# Altium PCB PCB1.PcbDoc
Units mil, origin at the board's own origin, x right, y up, seen from the top; angles counter-clockwise.
Board outline 3630.03 x 2820.03 mil, 2 copper layers (Top Layer, Bottom Layer); 66 components, 57 nets, 226 pads, 69 vias.
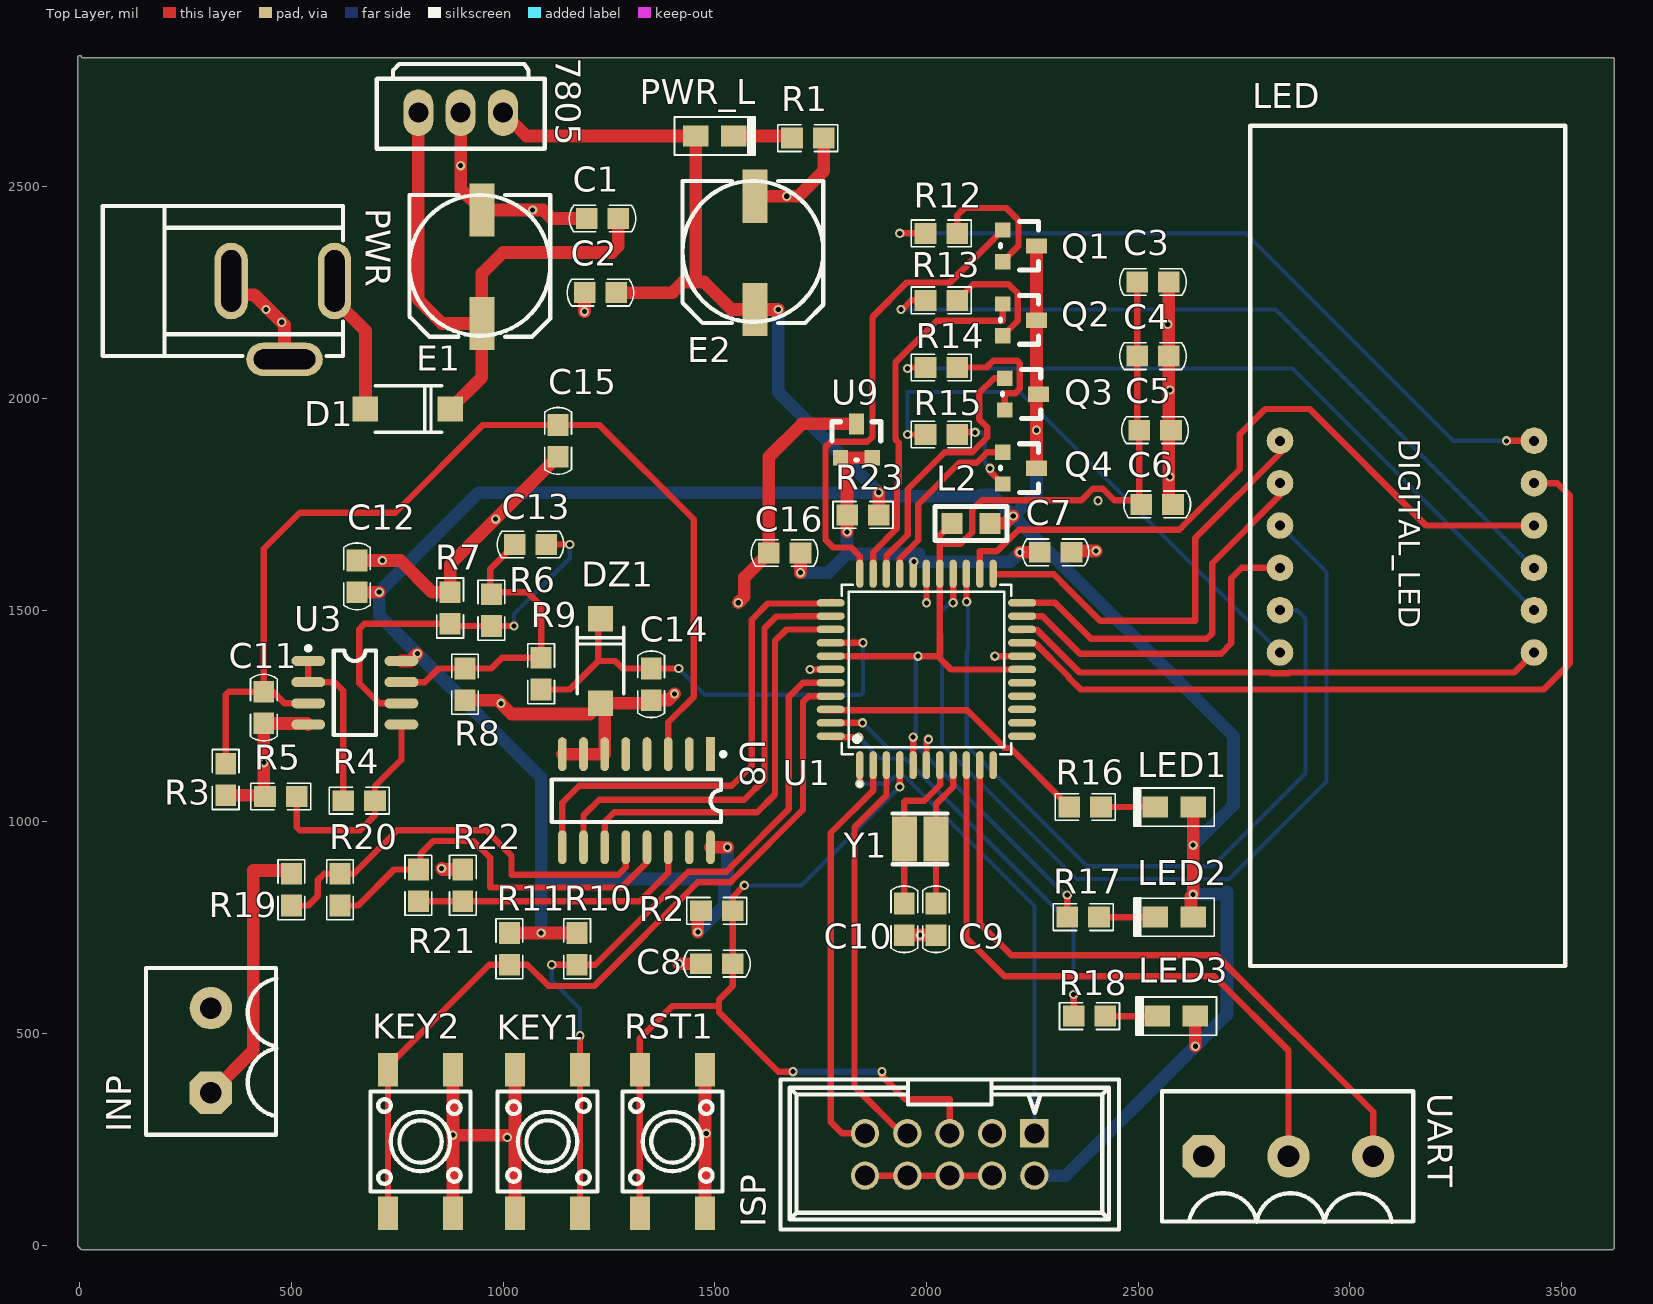
[diagram p0: Top Layer view]
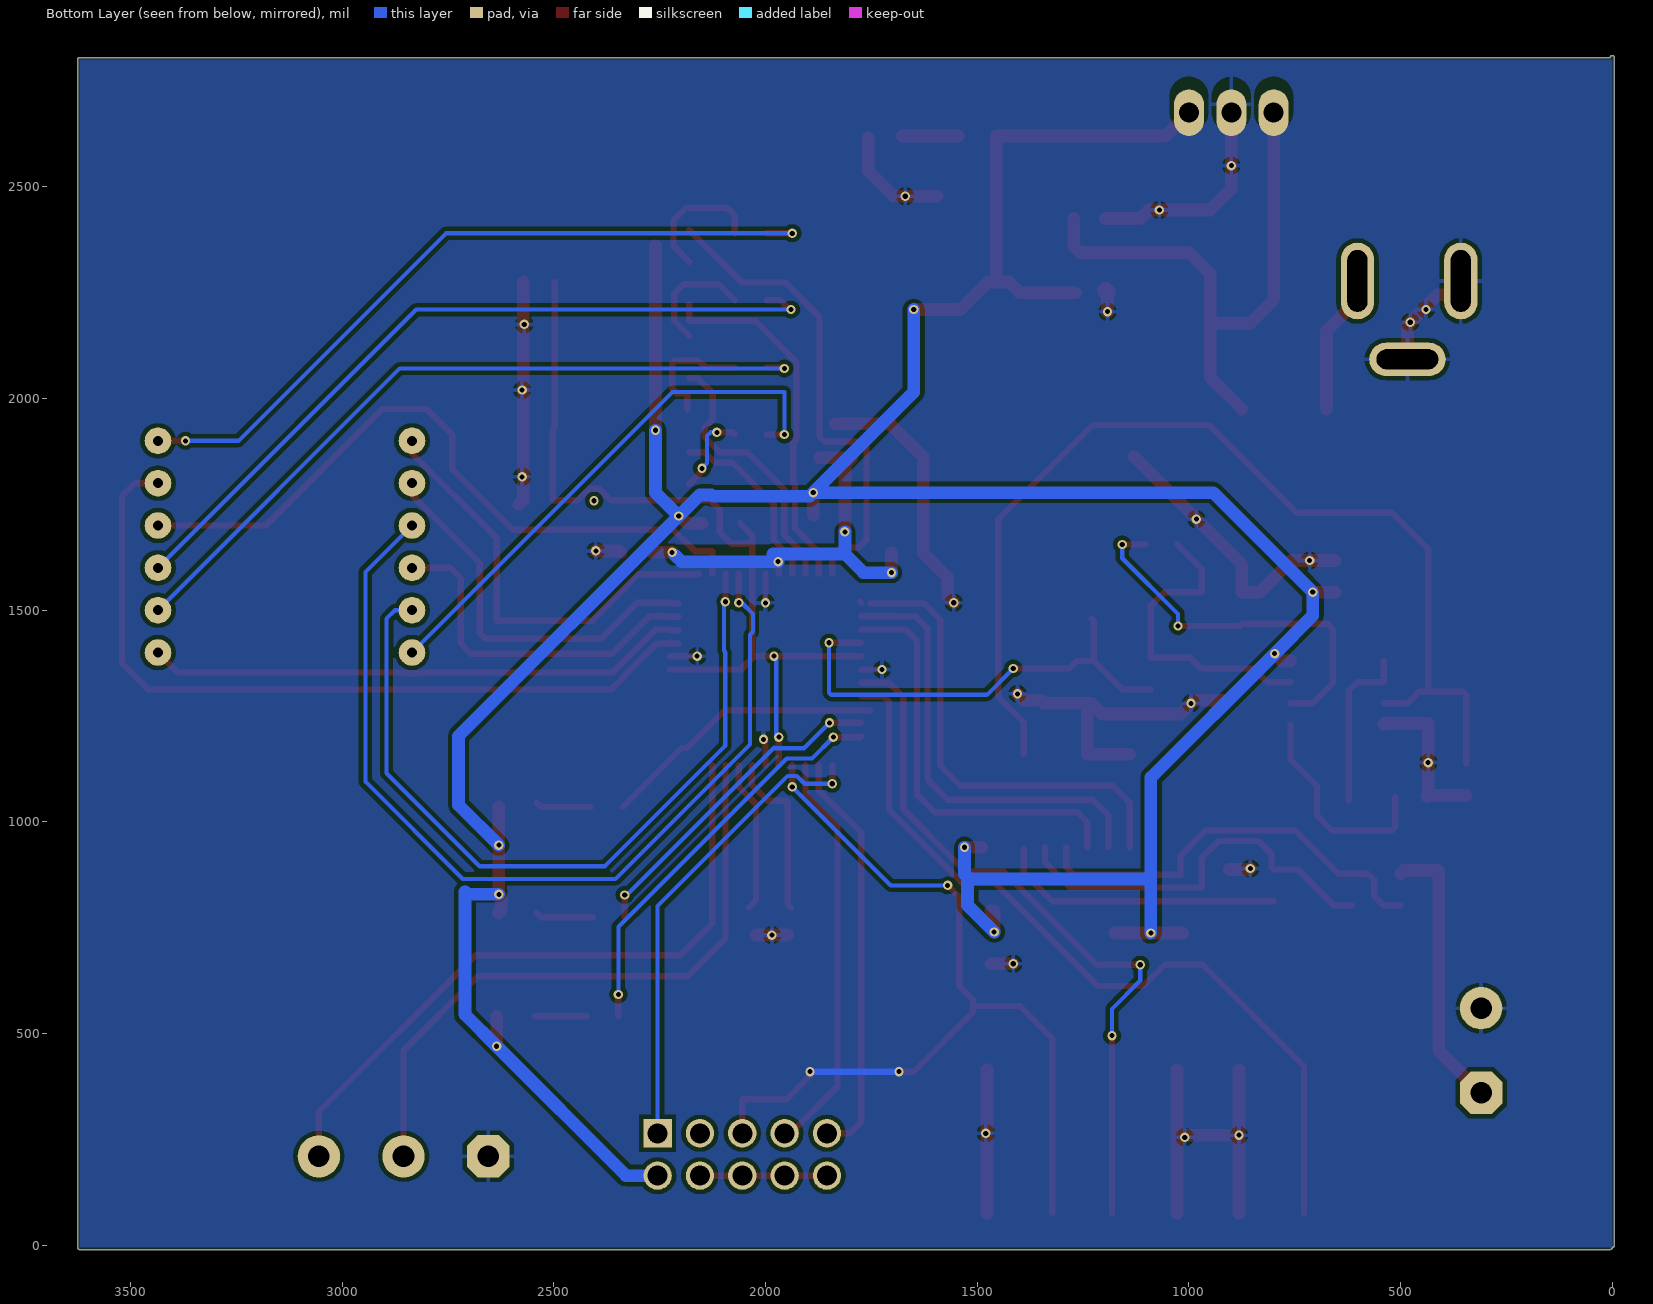
[diagram p1: Bottom Layer view, seen from below]

## Layer stack, top to bottom
Top Solder: solder mask 0.4, Solder Resist, Dk 3.5
Top Layer: signal copper 1.4
Dielectric 1: dielectric 12.6, FR-4, Dk 4.8
Bottom Layer: signal copper 1.4
Bottom Solder: solder mask 0.4, Solder Resist, Dk 3.5

## Board outline
-5.01,0 ccw(c0,0) -0.01,-5.02 ccw(c5,-5) 5,-10.02 3620,-10.02 ccw(c3620,-5) 3625.02,-5 3625.02,2800 ccw(c3620,2800) 3620,2805.02 5.01,2805.02 ccw(c0,2805) -5.01,2805

## Design rules (kind name [scope] priority, off if disabled: settings)
Clearance [All] p1: gap=10 ignorepadtopadclearanceinfootprint=FALSE except(0: Arc-Hole Track-Hole SMDPad-Hole THPad-Hole Via-Hole Fill-Hole Poly-Hole Region-Hole Text-Hole)
PolygonConnect [All] p1: connectstyle=Relief reliefconductorwidth=10 reliefentries=4 polygonreliefangle="90 Angle" airgapwidth=10
RoutingVias [All] p1: holewidth=28 width=50 viastyle="Through Hole" minholewidth=28 minwidth=50 maxholewidth=28 maxwidth=50
SolderMaskExpansion [All] p1: expansion=4
Width [All] p1: maxlimit=30 minlimit=10 preferedwidth=30 toplayer_minwidth=15 toplayer_maxwidth=15 toplayer_prefwidth=15 minimp=50.000000 maximp=50.000000 favimp=50.000000
30 further rules are at their usual default settings.

## Components (designator, comment, footprint, x,y, rotation, side; value= is the part's Value field where it differs from the comment)
7805 "7805" 7805 800,2675 r0 top
C1 "100nF/0805" C0805 1235,2425 r0 top value=104
C2 "100nF/0805" C0805 1230,2250 r0 top value=104
C3 "100nF/0805" C0805 2535,2275 r0 top value=104
C4 "100nF/0805" C0805 2535,2100 r0 top value=104
C5 "100nF/0805" C0805 2540,1925 r0 top value=104
C6 "100nF/0805" C0805 2545,1750 r0 top value=104
C7 "100nF/0805" C0805 2305,1636.71 r0 top value=104
C8 "10uF" C0805 1505,665 r180 top
C9 "100nF/0805" C0805 2022.41,770 r90 top value=104
C10 "100nF/0805" C0805 1947.59,770 r90 top value=104
C11 "100nF/0805" C0805 435,1270 r90 top value=104
C12 "100nF/0805" C0805 655,1580 r90 top value=104
C13 "100nF/0805" C0805 1065,1655 r180 top value=104
C14 "100nF/0805" C0805 1350,1325 r270 top value=104
C15 "47p" C0805 1130,1900 r90 top
C16 "10uF" C0805 1665,1635 r180 top
D1 "SS34" SMA 875,1975 r180 top
DZ1 "1SMA4728A" SMA 1230,1480 r270 top
E1 "220uF/35V" CAP-8*10.5MM/CDVT 1111.42,2480.79 r90 top
E2 "220uF/35V" CAP-8*10.5MM/CDVT 1756.42,2513.5 r90 top
INP "P" POWER2 310,360 r90 top
ISP "P10" IDC-10P 2055,214.51 r180 top
KEY1 "SW-BUTTON" KEY-SMD_4P-6-6 1105,245 r270 top
KEY2 "SW-BUTTON" KEY-SMD_4P-6-6 805,245 r90 top
L2 "Inductor" 0805L 2105.24,1705 r0 top
LED "LED 4*8" DIGITAL_LED_0.56 2835,1900 r270 top
LED1 "LED" LED0805 2630,1035 r0 top
LED2 "LED" LED0805 2630,775 r0 top
LED3 "LED" LED0805 2635,541.21 r0 top
PWR "DC005-T" DC005 480,2185 r0 top
PWR_L "LED" LED0805 1455,2620 r180 top
Q1 "8050" SOT-23 2180,2398 r270 top
Q2 "8050" SOT-23 2180,2223 r270 top
Q3 "8050" SOT-23 2185,2048 r270 top
Q4 "8050" SOT-23 2180,1873 r270 top
R1 "4K7/0805" R0805 1720,2615 r0 top value=1K
R2 "10K" R0805 1505,790 r180 top value=1K
R3 "10K" R0805 345,1100 r90 top value=1K
R4 "2K/0805" R0805 660,1050 r0 top value=1K
R5 "6K2/0805" R0805 475,1060 r0 top value=1K
R6 "6K2/0805" R0805 972.4,1500 r270 top value=1K
R7 "2K/0805" R0805 875,1505 r90 top value=1K
R8 "10K/0805" R0805 910,1325 r270 top value=1K
R9 "10K/0805" R0805 1090,1350 r270 top value=1K
R10 "4K7/0805" R0805 1175,700 r90 top value=1K
R11 "4K7/0805" R0805 1015,700 r90 top value=1K
R12 "4K7/0805" R0805 2035,2390 r180 top value=1K
R13 "4K7/0805" R0805 2035,2231.67 r180 top value=1K
R14 "4K7/0805" R0805 2035,2073.33 r180 top value=1K
R15 "4K7/0805" R0805 2035,1915 r180 top value=1K
R16 "4K7/0805" R0805 2375,1035 r180 top value=1K
R17 "4K7/0805" R0805 2370,775 r180 top value=1K
R18 "4K7/0805" R0805 2385,541.21 r180 top value=1K
R19 "10K/0805" R0805 500,840 r90 top value=1K
R20 "40.2K/0805" R0805 615,840 r90 top value=1K
R21 "40.2K/0805" R0805 800,850 r90 top value=1K
R22 "10K/0805" R0805 905,850 r270 top value=1K
R23 "510R" R0805 1850,1725 r0 top value=1K
RST1 "SW-BUTTON" KEY-SMD_4P-6-6 1400,245 r90 top
U1 "ATMEGA16A-AU" TQFP-44 2000,1360 r0 top
U3 "LM258" SO-8 540,1380 r0 top
U8 "CD4051BC" SO-16 1490,1160 r270 top
U9 "TL431" TL431 1797,1860 r90 top
UART "P" POWER3 2655,210 r0 top
Y1 "8M" SMD3225 1985,960 r0 top

## Footprints (in the part's own frame and the unit in brackets; to place one, negate y for a bottom-side part, rotate by r counter-clockwise, add the part's x,y. Pads: shape width x height; smd on the part's side, far side on the other; paste and mask are expansions set on the pad)
0805L [mm]
  rect 1.25x1.25 smd: 1(-1.143,0) 2(1.143,0)
  silkscreen extent -2.16,-1.02 2.16,1.02
7805 [mm]
  oval 1.8x2.8 hole 1.2: 1(0,0) 2(2.54,0) 3(5.08,0)
  silkscreen extent -2.49,-2.16 7.59,2.92
C0805 [mm]
  rect 1.3x1.25 smd: 1(-0.95,0) 2(0.95,0)
  silkscreen extent -2,-0.8 2,0.8
CAP-8*10.5MM/CDVT [mm]
  rect 3.2x1.5 smd: 1(-7.709,4.1) 2(-0.909,4.1)
  silkscreen extent -8.51,0 0,8.45
DC005 [mm]
  oval 2x4.6 hole 1.2 slot 3.7 at 90 deg: 1(3.1,2.35) 2(-3.1,2.35)
  oval 4.6x2 hole 1.2 slot 3.7 at 0 deg: 3(0.1,-2.35)
  silkscreen extent -10.8,-2.15 3.6,6.85
DIGITAL_LED_0.56 [mm]
  round 1.6 hole 0.6: 1(0,0) 2(2.54,0) 3(5.08,0) 4(7.62,0) 5(10.16,0) 6(12.7,0) 7(12.7,15.24) 8(10.16,15.24) 9(7.62,15.24) 10(5.08,15.24) 11(2.54,15.24) 12(0,15.24)
  silkscreen extent -18.9,-1.78 31.5,17.12
IDC-10P [mm]
  rect 1.7x1.7 hole 1.2: 1(-5.08,-1.27)
  round 1.7 hole 1.2: 2(-5.08,1.27) 3(-2.54,-1.27) 4(-2.54,1.27) 5(0,-1.27) 6(0,1.27) 7(2.54,-1.27) 8(2.54,1.27) 9(5.08,-1.27) 10(5.08,1.27)
  silkscreen extent -10.16,-4.5 10.16,4.5
KEY-SMD_4P-6-6 [mm]
  rect 2x1.2 smd: 1(-4.3,1.95) 1(4.3,1.95) 2(-4.3,-1.95) 2(4.3,-1.95)
  silkscreen extent -3,-3 3,3
LED0805 [mil]
  rect 60x50 smd: 1(0,0) 2(-90,0)
  silkscreen extent -141,-45 50,47
POWER2 [mm]
  oct 2.54x2.54 hole 1.3: 1(0,0)
  round 2.54 hole 1.3: 2(5.08,0)
  silkscreen extent -2.51,-3.92 7.49,3.9
POWER3 [mm]
  oct 2.54x2.54 hole 1.3: 1(0,0)
  round 2.54 hole 1.3: 2(5.08,0) 3(10.16,0)
  silkscreen extent -2.51,-3.94 12.57,3.9
R0805 [mm]
  rect 1.3x1.25 smd: 1(-0.95,0) 2(0.95,0)
  silkscreen extent -1.8,-0.8 1.8,0.8
SMA [mil]
  rect 60x59.06 smd: 1(200,0) 2(0,0)
  silkscreen extent 20,-55 177,55
SMD3225 [mm]
  rect 1.5x2.7 smd: 1(0.95,0) 2(-0.95,0)
  silkscreen extent -1.65,-1.52 1.65,1.52
SO-8 [mil]
  oval 80x24 smd: 1(0,0) 2(0,-50) 3(0,-100) 4(0,-150) 5(220,-150) 6(220,-100) 7(220,-50) 8(220,0)
  silkscreen extent -5,-175 160,35
SO-16 [mil]
  rect 80x20.47 smd: 1(0,0)
  oval 80x20.47 smd: 2(0,-50) 3(0,-100) 4(0,-150) 5(0,-200) 6(0,-250) 7(0,-300) 8(0,-350) 9(220,-350) 10(220,-300) 11(220,-250) 12(220,-200) 13(220,-150) 14(220,-100) 15(220,-50) 16(220,0)
  silkscreen extent -5,-375 160,35
SOT-23 [mil]
  rect 36x36 smd: 1(0,0) 2(75,0)
  rect 36x50 smd: 3(38,80)
  silkscreen extent -20,-5 95,85
TL431 [mil]
  rect 36x36 smd: 1(0,0) 2(0,-75)
  rect 50x36 smd: 3(80,-38)
  silkscreen extent -5,-95 85,20
TQFP-44 [mm]
  oval 0.448x1.684 smd: 1(-4,-5.742) 2(-3.2,-5.742) 3(-2.4,-5.742) 4(-1.6,-5.742) 5(-0.8,-5.742) 6(0,-5.742) 7(0.8,-5.742) 8(1.6,-5.742) 9(2.4,-5.742) 10(3.2,-5.742) 11(4,-5.742) 23(4,5.742) 24(3.2,5.742) 25(2.4,5.742) 26(1.6,5.742) 27(0.8,5.742) 28(0,5.742) 29(-0.8,5.742) 30(-1.6,5.742) 31(-2.4,5.742) 32(-3.2,5.742) 33(-4,5.742)
  oval 1.684x0.448 smd: 12(5.742,-4) 13(5.742,-3.2) 14(5.742,-2.4) 15(5.742,-1.6) 16(5.742,-0.8) 17(5.742,0) 18(5.742,0.8) 19(5.742,1.6) 20(5.742,2.4) 21(5.742,3.2) 22(5.742,4) 34(-5.742,4) 35(-5.742,3.2) 36(-5.742,2.4) 37(-5.742,1.6) 38(-5.742,0.8) 39(-5.742,0) 40(-5.742,-0.8) 41(-5.742,-1.6) 42(-5.742,-2.4) 43(-5.742,-3.2) 44(-5.742,-4)
  silkscreen extent -5.08,-6.98 5.08,5.08

## Part data
C1 C2 C3 C4 C5 C6 C7 C9 C10 C11 C12 C13 C14: library part "Cap Semi", "Capacitor (Semiconductor SIM Model)", LatestRevisionDate=17-Jul-2002, LatestRevisionNote="Re-released for DXP Platform.", PackageReference=C1206, Published=8-Jun-2000, Publisher="Altium Limited"
C8 C16: library part CAP, "普通小电容", mark=10uF/16V/0805
C15: library part "Cap Pol1", "Polarized Capacitor (Radial)", Manufacturer="Generic Components", Class=Passive, Published=08/06/2000, Publisher="Altium Hobart Technology Centre", SubClass=Capacitor
D1: library part "Diode 1N914", "High Conductance Fast Diode", Code_JEDEC=DO-204-AH, ComponentLink1Description="Manufacturer Link", ComponentLink1URL=http://www.fairchildsemi.com/, ComponentLink2Description=Datasheet, ComponentLink2URL=http://www.fairchildsemi.com/ds/1N%2F1N4448.pdf, DatasheetVersion=1997, LatestRevisionDate=17-Jul-2002, LatestRevisionNote="Re-released for DXP Platform.", PackageReference=DO-35, Published=8-Jun-2000, Publisher="Altium Limited"
DZ1: library part DZ, "Schottky Rectifier", mark=1SMA4728A
E1 E2: library part ELECTRO2, "Electrolytic Capacitor"
INP: library part P2
KEY1 KEY2 RST1: "6*6*5mm轻触开关"
LED: library part LED4*8
PWR: BOM_JLCPCB Part Class="Extended Part", BOM_Manufacturer="SHOU HAN", BOM_Manufacturer Part=DC005-T, BOM_Supplier=LCSC, BOM_Supplier Part=C431532, Contributor=LCSC, spicePre=D, spiceSymbolName=DC005-T
Q1 Q2 Q3 Q4: library part TRIODE-NPN-MMBT3904, "Transistor;NPN;40V;200mA;SOT23;1.1mm;ROHS", Manufacture 1=长?, Manufacture 1 P/N=MMBT3904, Geometry.Height=1.1mm, PCB DECAL=SOT-23(MMBT3904), Serial Number=81232000008
R1 R2 R3 R4 R5 R6 R7 R8 R9 R10 R11 R12 R13 R14 R15 R16 R17 R18 R19 R20 R21 R22 R23: library part RES, "Resistor", LatestRevisionDate=17-Jul-2002, LatestRevisionNote="Re-released for DXP Platform.", PackageReference=AXIAL-0.4, Published=8-Jun-2000, Publisher="Altium Limited"
  R1 R10 R11 R12 R13 R14 R15 R16 R17 R18: mark=4K7/0805
  R2 R3 R8 R9 R19 R22: mark=10K/0805
  R4 R7: mark=2K/0805
  R5 R6: mark=6K2/0805
  R20 R21: mark=40.2K/0805
  R23: mark=510R/0805
U1: BOM_JLCPCB Part Class="Extended Part", BOM_Manufacturer=MICROCHIP, BOM_Manufacturer Part=ATMEGA16A-AU, BOM_Supplier=LCSC, BOM_Supplier Part=C5658, spicePre=U, spiceSymbolName=ATMEGA16A-AU
U3: library part LM393, "电压比较器"
UART: library part P3
Y1: library part XTAL, "Crystal Oscillator", LatestRevisionDate=17-Jul-2002, LatestRevisionNote="Re-released for DXP Platform.", PackageDescription="Crystal, Thru-Hole; 2 Leads; Body 3.1 x 8.2 mm (Dia.xH)", PackageReference=R38, Published=8-Jun-2000, Publisher="Altium Limited"
L2: Code_IEC=1005, Code_JEITA=0402, LatestRevisionDate=29-May-2009, LatestRevisionNote="IPC-7351 Footprint Added.", mark=4.7uH\0805, PackageDescription="Chip Inductor", PackageReference=0402-A, Published=8-Jun-2000, Publisher="Altium Limited"
U9: LatestRevisionDate=17-Jul-2002, LatestRevisionNote="Re-released for DXP Platform.", mark=TL431, PackageDescription="Diode, Thru-Hole; 2 Leads; 0.7 in Pin Spacing", PackageReference=DIODE-0.7, Published=8-Jun-2000, Publisher="Altium Limited"

## Via types
v1: diameter 22, hole 12, Top Layer to Bottom Layer, tented both sides, 69 vias

## Nets (pads, with @x,y where several pads share a name; then routed paths per layer and width w, separated by ;. In a path a pad name is that pad's centre, name@x,y a point inside that pad or via, vN(x,y) a via of type N, cw(c..) or ccw(c..) an arc to the next point about the centre after c; other vN are vias at no path point)
+5V: 7805.3 C2.2 C12.1 E2.1 ISP.2 L2.2 LED1.1 LED2.1 LED3.1 PWR_L.1 Q1.3 Q2.3 Q3.3 Q4.3 R2.2 R10.2 R11.2 R23.2 U3.8 U8.16 | length 8584.1
  Top Layer w30: C12.1 v1(707.6,1542.6) ; U3.8 780.26,1380 v1(797.5,1397.24) ; 7805.3 1055,2620 1300,2620 PWR_L.1 1455,2275 ; R11.2 v1(1090,737.4) R10.2 ; C2.2 1400,2250 1425,2275 1455,2275 ; v1(1460,740) 1460,790 R2.2 ; U8.16 v1(1530,940) ; v1(1650,2210) E2.1 1540,2210 1475,2275 1455,2275 ; R23.2 v1(1887.4,1777.6) ; L2.2 2185.04,1705 2202.54,1722.5 v1(2205.04,1722.5) ; Q4.3 v1(2260,1925) Q2.3 Q1.3 ; LED2.1@2630,785 2625,790 2625,823.85 v1(2630,828.85) v1(2630,945) LED1.1 ; v1(2635,470) LED3.1
  Bottom Layer w10: 1518.21,865 1523.21,870 ; v1(1887.4,1777.6) v1@1893,1772
  Bottom Layer w30: v1(1090,737.4) 1090,865 ; v1(1460,740) 1523.21,803.21 1523.21,870 1530,876.79 v1(1530,940) ; 1518.21,865 1090,865 ; v1(1650,2210) 1650,2015 v1(1887.4,1777.6) 942.6,1777.6 v1(707.6,1542.6) 707.6,1487.14 v1(797.5,1397.24) 1090,1104.74 1090,865 ; v1@1893,1772 1896,1769 2124.91,1769 2127.91,1772 2155.54,1772 v1(2205.04,1722.5) ; ISP.2 2329.51,164.51 v1(2635,470) 2710,545 2710,835.18 2703.67,828.85 v1(2630,828.85) ; v1(2260,1925) 2260,1777.46 v1(2205.04,1722.5) ; v1(2630,945) 2725,1040 2725,1202.54 v1(2205.04,1722.5)
A: LED.11 U1.19 | length 1881.6
  Top Layer w15: U1.19@2205.04,1421.46 U1.19@2227.6,1421.46 ; U1.19 U1.19@2227.6,1421.46 ; LED.11 3490,1800 3520,1770 3520,1375 3457.6,1312.6 2364.64,1312.6 2336.46,1340.79 2336.46,1342.65 2257.65,1421.46 U1.19@2227.6,1421.46
ADC0: C14.1 DZ1.2 R9.2 U1.37 | length 1119.3
  Top Layer w15: R9.2 1157.6,1312.6 1225,1380 ; DZ1.2 1225,1475 1225,1380 ; v1(1415,1362.4) C14.1 1282.6,1362.4 1265,1380 1225,1380 ; U1.37 v1(1850,1422.99)
  Bottom Layer w10: v1(1415,1362.4) 1477.4,1300 1845,1300 1850,1305 v1(1850,1422.99)
B: LED.7 U1.20 | length 1293.1
  Top Layer w15: U1.20@2205.04,1452.95 U1.20@2226.06,1452.95 ; U1.20 2259.98,1454.49 2361.59,1352.87 2812.84,1352.87 2814.71,1351 2855.29,1351 2857.16,1352.87 3387.87,1352.87 LED.7
C: LED.4 U1.21 | length 840.5
  Top Layer w15: U1.21@2205.04,1484.45 U1.21@2226.06,1484.45 ; U1.21 2274.02,1485.98 2362.6,1397.4 2695.91,1397.4 2720,1421.49 2720,1575 2745,1600 LED.4
CD4501_A: U1.36 U8.11 | length 994.6
  Top Layer w15: U8.11 1240,1000 1262.4,1022.4 1600,1022.4 1642.4,1064.8 1642.4,1427.4 1669.49,1454.49 U1.36
CD4501_B: U1.35 U8.10 | length 1058.6
  Top Layer w15: U8.10 1190,1015.36 1227.24,1052.6 1570,1052.6 1617.4,1100 1617.4,1457.4 1645.14,1485.14 1690.1,1485.14 1690.94,1485.98 ; 1695.91,1485.98 U1.35
CD4501_C: U1.34 U8.9 | length 1118.9
  Top Layer w15: U8.9 1140,1045 1180,1085 1540,1085 1587.39,1132.39 1587.39,1477.74 1625.59,1515.94 U1.34@1752.91,1515.94 ; U1.34 U1.34@1776.46,1520
D: LED.2 U1.22 | length 931.7
  Top Layer w15: U1.22@2205.04,1515.94 U1.22@2226.06,1515.94 ; U1.22 2303.46,1517.48 2388.54,1432.4 2662.4,1432.4 2675,1445 2675,1611.25 2835,1771.25 LED.2
DP: LED.3 U1.26 | length 2209.2
  Top Layer w15: v1(2062.99,1517.48) U1.26
  Bottom Layer w10: v1(2062.99,1517.48) 2056.26,1517.48 2029.77,1490.99 2029.77,1449.23 2036.99,1442.01 2036.99,1183.01 2354.82,865.18 2715.18,865.18 2945,1095 2945,1590 LED.3
E: LED.1 U1.23 | length 1028.6
  Top Layer w15: U1.23 2159.02,1584.53 2300.78,1584.53 2318.5,1566.8 2318.5,1566.5 2410,1475 2635,1475 2635,1670.49 2840,1875.49 LED.1@2840,1895
F: LED.10 U1.24 | length 1663.3
  Top Layer w15: U1.24 2125.98,1639.02 2166.67,1639.02 2217.65,1690 2597.35,1690 2740,1832.65 2740,1915 2800,1975 2905,1975 3180,1700 LED.10
G: LED.5 U1.25 | length 1851.3
  Top Layer w15: v1@2094.49,1520 U1.25
  Bottom Layer w10: v1(2095,1520) 2098.4,1516.6 2098.4,1404.23 2095,1400.83 2095,1180 2380,895 2675,895 2895,1115 2895,1480 2875,1500 LED.5
GND: 7805.2 C1.1 C2.1 C3.2 C4.2 C5.2 C6.2 C7.2 C8.2 C9.1 C10.1 C11.1 C12.2 C14.2 C15.1 C16.2 DZ1.1 E1.2 E2.2 INP.2 KEY1.2 KEY2.2 PWR.2 PWR.3 R1.2 R3.1 R5.1 R7.2 R8.2 R22.1 RST1.2 U1.6 U1.18 U1.28 U1.39 U3.4 U8.6 U8.7 U8.8 U9.3 UART.1 | length 5671.5
  Top Layer w1: C12.2@647.6,1610 C12.2
  Top Layer w15: v1(1725,1360) U1.39 ; U1.6 v1@2000,1195 ; v1(2000,1517.4) U1.28 ; v1(2161.5,1391.5) U1.18
  Top Layer w30: R3.1 R5.1@435,1062.6 ; PWR.2 390.48,2245 412.28,2245 v1(477.28,2180) 483.94,2173.34 PWR.3 ; R5.1 R5.1@435,1062.6 ; U3.4 537.4,1232.6 C11.1 v1(435,1140) R5.1@435,1062.6 ; C12.2 v1(715,1617.4) 757.6,1617.4 832.6,1542.4 R7.2 875,1607.6 C15.1 ; v1(855,890) 857.6,887.4 R22.1 ; KEY2.2@881.78,75.71 v1(881.78,260) ; KEY2.2@881.78,414.29 v1(881.78,260) ; 7805.2 v1(900,2550) 900,2495 E1.2 v1(1070,2445) 1095,2445 1115,2425 C1.1 ; R8.2 987.4,1287.6 v1(995,1280) 1020,1255 1205,1255 DZ1.1 ; KEY1.2@1028.22,75.71 1028.22,264.51 ; KEY1.2@1028.22,414.29 1028.22,264.51 ; U8.8 U8.7 U8.6 1240,1270 DZ1.1 ; v1(1192.6,2205) C2.1 ; v1(1405,1302.43) 1390.17,1287.6 C14.2 1342.4,1280 DZ1.1 ; v1(1415,665) C8.2 ; RST1.2@1476.78,75.71 RST1.2@1476.78,414.29 ; v1(1555.48,1517.48) 1570,1532 1570,1577.4 C16.2 1627.6,1861.69 1705.91,1940 U9.3 ; E2.2 v1(1670,2477.72) 1697.72,2477.72 1757.4,2537.4 R1.2 ; C10.1 v1(1985,732.6) C9.1 ; C7.2 2345.69,1640 v1(2400.94,1640) ; C3.2 C4.2 2572.4,1760 C6.2 ; v1(881.78,260) 1023.72,260 1028.22,264.51
  Top Layer w40: C2.1 C2.1@1197.6,2255
  other v1: 1010,255 1480,264.51 2005,1195 982.4,1715 2575,1815 2575,2020 2570,2175 440,2210
IN+: INP.1 R19.2 | length 659.6
  Top Layer w30: INP.1 410,460 410,885 492.4,885 R19.2
KEY1: KEY1.1 R10.1 U1.40 | length 1704.3
  Top Layer w15: v1(1115,662.6) R10.1 1217.6,662.6 1437.5,882.5 1526.84,882.5 1547.84,903.5 1548.14,903.5 1675,1030.36 1675,1295 1708.5,1328.5 U1.40 ; KEY1.1@1181.78,75.71 1181.78,414.29 v1(1181.78,495)
  Bottom Layer w10: v1(1115,662.6) 1115,625 1181.78,558.22 v1(1181.78,495)
KEY2: KEY2.1 R11.1 U1.41 | length 1946.3
  Top Layer w15: KEY2.1@728.22,75.71 728.22,414.29 728.22,423.22 967.6,662.6 R11.1 1057.4,662.6 1107.6,612.4 1215.05,612.4 1460.15,857.5 1537.5,857.5 1541.5,861.5 1541.5,861.8 1558.2,878.5 1558.5,878.5 1700,1020 1700,1020.3 1708.5,1028.81 1708.5,1283.5 1722.01,1297.01 U1.41
LED1: R16.2 U1.42 | length 679.5
  Top Layer w15: U1.42@1752.91,1263.98 2096.02,1263.98 2185.33,1174.67 2197.93,1174.67 R16.2
LED2: R17.2 U1.43 | length 764.7
  Top Layer w15: U1.43 v1(1849.02,1234.02) ; R17.2 v1(2332.6,827.4)
  Bottom Layer w10: v1(1849.02,1234.02) 1909.03,1174 1979.27,1174 1980.27,1175 2320.14,835.14
LED3: R18.2 U1.44 | length 971.3
  Top Layer w15: U1.44 1776.46,1200 v1(1840,1200) ; R18.2 v1(2347.6,592.4)
  Bottom Layer w10: v1(1840,1200) 1890,1150 1950,1150 2347.6,752.4 v1(2347.6,592.4)
MISO: ISP.9 U1.2 | length 976.4
  Top Layer w15: ISP.9 1800.49,264.51 1773.94,291.06 1773.94,973.94 1874.02,1074.02 U1.2
MOSI: ISP.1 U1.1 | length 1128.3
  Top Layer w15: v1(1842.52,1090) U1.1
  Bottom Layer w10: v1(1842.52,1090) 1907.57,1090 1926.24,1108.67 1947.78,1108.67 2255,801.45 ISP.1
Net7805_1: 7805.1 C1.2 D1.2 E1.1 | length 1380.5
  Top Layer w30: 7805.1 800,2233 855.72,2177.28 E1.1 ; D1.2 950,2050 E1.1 ; C1.2 1272.4,2360 1257.4,2345 1000,2345 950,2295 E1.1
NetC3_1: C3.1 C4.1 C5.1 C6.1 L2.1 U1.5 U1.17 U1.27 U1.38 | length 2139
  Top Layer w15: U1.38 v1(1980,1391.5) 2026.5,1391.5 ; U1.5 v1(1968.5,1200) ; L2.1 2031.5,1676.25 2031.5,1656.82 ; U1.17 2058,1360 2026.5,1391.5 ; C3.1 C4.1 2497.6,1930 C5.1 2502.6,1760 2443.85,1760 2416.81,1787.05 2393.19,1787.05 2366.15,1760 2131.28,1760 2108.13,1736.86 2108.13,1684.46 2080.5,1656.82 2031.5,1656.82 ; 2026.5,1391.5 2031.5,1396.49 U1.27 2031.5,1656.82
  Bottom Layer w10: v1(1968.5,1200) 1975,1206.5 1975,1386.5 v1(1980,1391.5)
NetC13_1: C13.1 R6.2 R7.1 U3.6 | length 922.4
  Top Layer w15: U3.6 707.6,1280 660,1327.6 660,1455 672.6,1467.6 R7.1 880,1462.6 R6.2 v1(1025.82,1462.6) ; C13.1 v1(1157.6,1655)
  Bottom Layer w10: v1(1025.82,1462.6) 1025.82,1490.82 1157.6,1622.6 v1(1157.6,1655)
NetC13_2: C13.2 R6.1 R8.1 R9.1 U3.7 | length 746.3
  Top Layer w15: U3.7 815,1330 847.4,1362.4 R8.1 972.4,1362.4 997.4,1387.4 R9.1 1090,1510 1057.6,1542.4 970,1542.4 970,1597.4 C13.2
NetD1_1: D1.1 PWR.1 | length 332.7
  Top Layer w15: PWR.1@602.04,2232.96 PWR.1
  Top Layer w30: PWR.1@602.04,2232.96 675,2160 D1.1
NetISP_4: ISP.4 ISP.6 ISP.8 ISP.10 | length 300
  Top Layer w15: ISP.10 ISP.8 ISP.6 ISP.4
NetLED1_2: LED1.2 R16.1 | length 131.7
  Top Layer w15: R16.1 2530,1035 LED1.2@2540,1045
NetLED2_2: LED2.2 R17.1 | length 136.7
  Top Layer w15: R17.1 2530,775 LED2.2@2540,785
NetLED3_2: LED3.2 R18.1 | length 122.6
  Top Layer w15: R18.1 LED3.2
NetLED_6: LED.6 R15.2 | length 1276.4
  Top Layer w15: v1(1955.49,1915) R15.2
  Bottom Layer w10: v1(1955.49,1915) 1955.49,2015 2220,2015 LED.6
NetLED_8: LED.8 R14.2 | length 1759.1
  Top Layer w15: v1(1955.49,2070.82) 1958.01,2073.33 R14.2
  Bottom Layer w10: v1(1955.49,2070.82) 2864.18,2070.82 LED.8
NetLED_9: LED.9 R13.2 | length 1805.1
  Top Layer w15: v1@1947.25,2214.65 1964.26,2231.67 R13.2
  Bottom Layer w10: v1(1940,2210) 2825,2210 3379.24,1655.76 3407.3,1627.7 LED.9
NetLED_12: LED.12 R12.2 | length 1761.5
  Top Layer w15: v1(1937.01,2390) R12.2 ; v1(3370,1900) LED.12
  Bottom Layer w10: v1(1937.01,2390) 2755,2390 3245,1900 v1(3370,1900)
NetPWR_L_2: PWR_L.2 R1.1 | length 139.7
  Top Layer w15: R1.1@1677.6,2620 R1.1
  Top Layer w30: PWR_L.2 R1.1@1677.6,2620
NetQ1_2: Q1.2 R12.1 | length 320.5
  Top Layer w15: R12.1 2072.4,2432.4 2090,2450 2188.75,2450 2217.5,2421.25 2217.5,2360.5 Q1.2
NetQ2_2: Q2.2 R13.1 | length 282.9
  Top Layer w15: R13.1 2110.73,2270 2193.75,2270 2215.5,2248.25 2215.5,2183.5 Q2.2
NetQ3_2: Q3.2 R14.1 | length 296.9
  Top Layer w15: R14.1 2141.81,2073.33 2157.48,2089 2215,2089 2220.5,2083.5 2220.5,2022.75 2210.25,2012.5 2185,2012.5 Q3.2
NetQ4_2: Q4.2 R15.1 | length 202.4
  Top Layer w15: R15.1 2077.4,1920 v1(2115,1920) ; v1(2150,1835) 2150,1828 Q4.2
  Bottom Layer w10: v1(2115,1920) 2130,1920 2138,1912 2138,1847 v1(2150,1835)
NetR4_1: R4.1 U3.1 U3.2 | length 400.6
  Top Layer w15: U3.1 U3.2 602.04,1330 622.6,1309.44 R4.1
NetR4_2: R4.2 R5.2 U3.5 | length 516
  Top Layer w15: R5.2 512.4,987.6 520,980 662.4,980 697.4,1015 R4.2 697.4,1084.18 760,1146.78 U3.5
OSC_IN: C9.2 U1.8 Y1.1 | length 360.6
  Top Layer w15: C9.2@2040,797.4 2022.41,815 Y1.1 2022.41,1042.08 2062.99,1082.67 U1.8
OSC_OUT: C10.2 U1.7 Y1.2 | length 401.9
  Top Layer w15: C10.2@1940,797.4 1947.59,805 Y1.2 1947.59,1047.59 1950,1050 1994.97,1050 2032.81,1087.85 2032.81,1132.62 U1.7
RST: C8.1 ISP.5 R2.1 RST1.1 U1.4 | length 2221.9
  Top Layer w15: RST1.1@1323.22,75.71 1323.22,414.29 1323.22,488.22 1400,565 1510,565 ; v1(1570,850) 1542.4,822.4 R2.1 C8.1 1542.4,612.4 1510,580 1510,565 ; v1(1685,410) 1650,410 1510,550 1510,565 ; v1(1895,410) 1895,400 1950,345 2055,345 ISP.5 ISP.5@2027.07,264.51 ; v1(1937.01,1082.67) U1.4
  Bottom Layer w10: v1(1570,850) 1704.34,850 v1(1937.01,1082.67)
  Bottom Layer w15: v1(1685,410) 1685,415 1690,410 v1(1895,410)
RXD: U1.9 UART.2 | length 1529.2
  Top Layer w15: U1.9 2094.49,725 2184.49,635 2680,635 2855,460 UART.2
SCK: ISP.7 U1.3 | length 961
  Top Layer w15: U1.3 1905.51,1062.91 1830,987.4 1830,375 1940.49,264.51 ISP.7
SEG1: Q1.1 U1.33 | length 1154.1
  Top Layer w15: U1.33 1842.52,1627.48 1822.11,1647.89 1779.76,1647.89 1761.5,1666.15 1761.5,1885.25 1773.75,1897.5 1860.25,1897.5 1872.5,1909.75 1872.5,2192.5 1953.77,2273.77 2055.77,2273.77 Q1.1
SEG2: Q2.1 U1.32 | length 861.3
  Top Layer w15: U1.32 1874.02,1636.67 1930.49,1693.14 1930.49,1795.85 1935,1800.36 1935,1895.19 1926.99,1903.2 1926.99,2085.77 2024.72,2183.5 2180,2183.5 Q2.1
SEG3: Q3.1 U1.31 | length 641
  Top Layer w15: U1.31 1905.51,1628.16 1955.49,1678.14 1955.49,1785.49 2042.89,1872.89 2108.2,1872.89 2143.5,1908.2 2143.5,1931.8 2125,1950.3 2125,2013.19 2159.81,2048 Q3.1@2180,2048
SEG4: Q4.1 U1.30 | length 432.7
  Top Layer w15: U1.30 1937.01,1621.77 1980.49,1665.26 1980.49,1750.49 2077.89,1847.89 2118.55,1847.89 2143.66,1873 Q4.1
TEM_1: R19.1 R20.2 U8.12 | length 1010.1
  Top Layer w15: R19.1 540.2,802.6 562.6,825 562.6,862.6 577.6,877.6 647.6,877.6 750,980 960,980 1020,920 1020,875 1272.4,875 1290,892.6 U8.12
TEM_2: R20.1 R21.2 U8.13 | length 953.6
  Top Layer w15: R20.1 657.6,802.6 742.4,887.4 R21.2 805,892.4 805,925 835,955 930,955 970,915 970,845 1280,845 1340,905 U8.13
TEM_3: R21.1 R22.2 U8.14 | length 672.9
  Top Layer w15: R21.1 R22.2 1322.6,812.6 1390,880 U8.14@1390,935
TEMP: C11.2 C15.2 R3.2 U3.3 U8.3 | length 2517.8
  Top Layer w15: R3.2 345,1300 352.4,1307.4 C11.2 ; U3.3 483.94,1280 456.54,1307.4 C11.2 ; U8.3 1390,1235 1450,1295 1450,1715 1227.6,1937.4 C15.2 952.4,1937.4 745,1730 519.9,1730 435,1645.1 C11.2
TXD: U1.10 UART.3 | length 1592.3
  Top Layer w15: U1.10 2125.98,760 2200.98,685 2685,685 3055,315 UART.3
VDDA: C7.1 C16.1 R23.1 U1.29 U9.1 U9.2 | length 1014.4
  Top Layer w15: U1.29 1968.5,1615.49 1969.35,1614.64 v1(1970.18,1614.64)
  Top Layer w30: v1(1702.4,1588.66) C16.1 ; v1(1812.6,1685) R23.1 1812.6,1844.4 U9.1 U9.2 ; v1(2220.5,1636.71) C7.1
  Bottom Layer w10: v1(1970.18,1614.64) 1970.18,1620.38 1982.4,1632.6 ; v1@2213.79,1630 v1(2220.5,1636.71)
  Bottom Layer w30: v1(1702.4,1588.66) 1768.66,1588.66 1812.6,1632.6 ; v1(1812.6,1685) 1812.6,1632.6 ; v1(1970.18,1614.64) 2198.43,1614.64 2211.27,1627.48 v1@2213.79,1630 ; 1982.4,1632.6 1812.6,1632.6
pads on no net: ISP.3 U1.11 U1.12 U1.13 U1.14 U1.15 U1.16 U8.1 U8.2 U8.4 U8.5 U8.15
copper on no net:
  other v1: 2405,1758.55

## Polygon pours and split planes (outlines as drawn)
GND on Top Layer "Top Layer-GND 1" (solid, pour order 4): 3040,2310
GND on Bottom Layer "Bottom Layer-GND" (solid, pour order 8): 0,2800 3620,2800 3620,-5 0,-5

## Silkscreen, mask and mechanical layers (free items; w line width, h text height)
Bottom Solder:
  lines w10: 0,2805 0,0 5,-5 3620,-5 3620,2800 5,2800

## Text inside footprints (layer, text, board x,y; h text height)
LED: Top Overlay "DIGITAL_LED" at 3115,1905 h51.18 r270